# Altium PCB PCB_Hammond_1591GSGY.PcbDoc
Units mil, origin at the board's own origin, x right, y up, seen from the top; angles counter-clockwise.
Board outline 4566.93 x 3503.94 mil, 2 copper layers (Top Layer, Bottom Layer); 47 components, 80 nets, 349 pads, 78 vias.
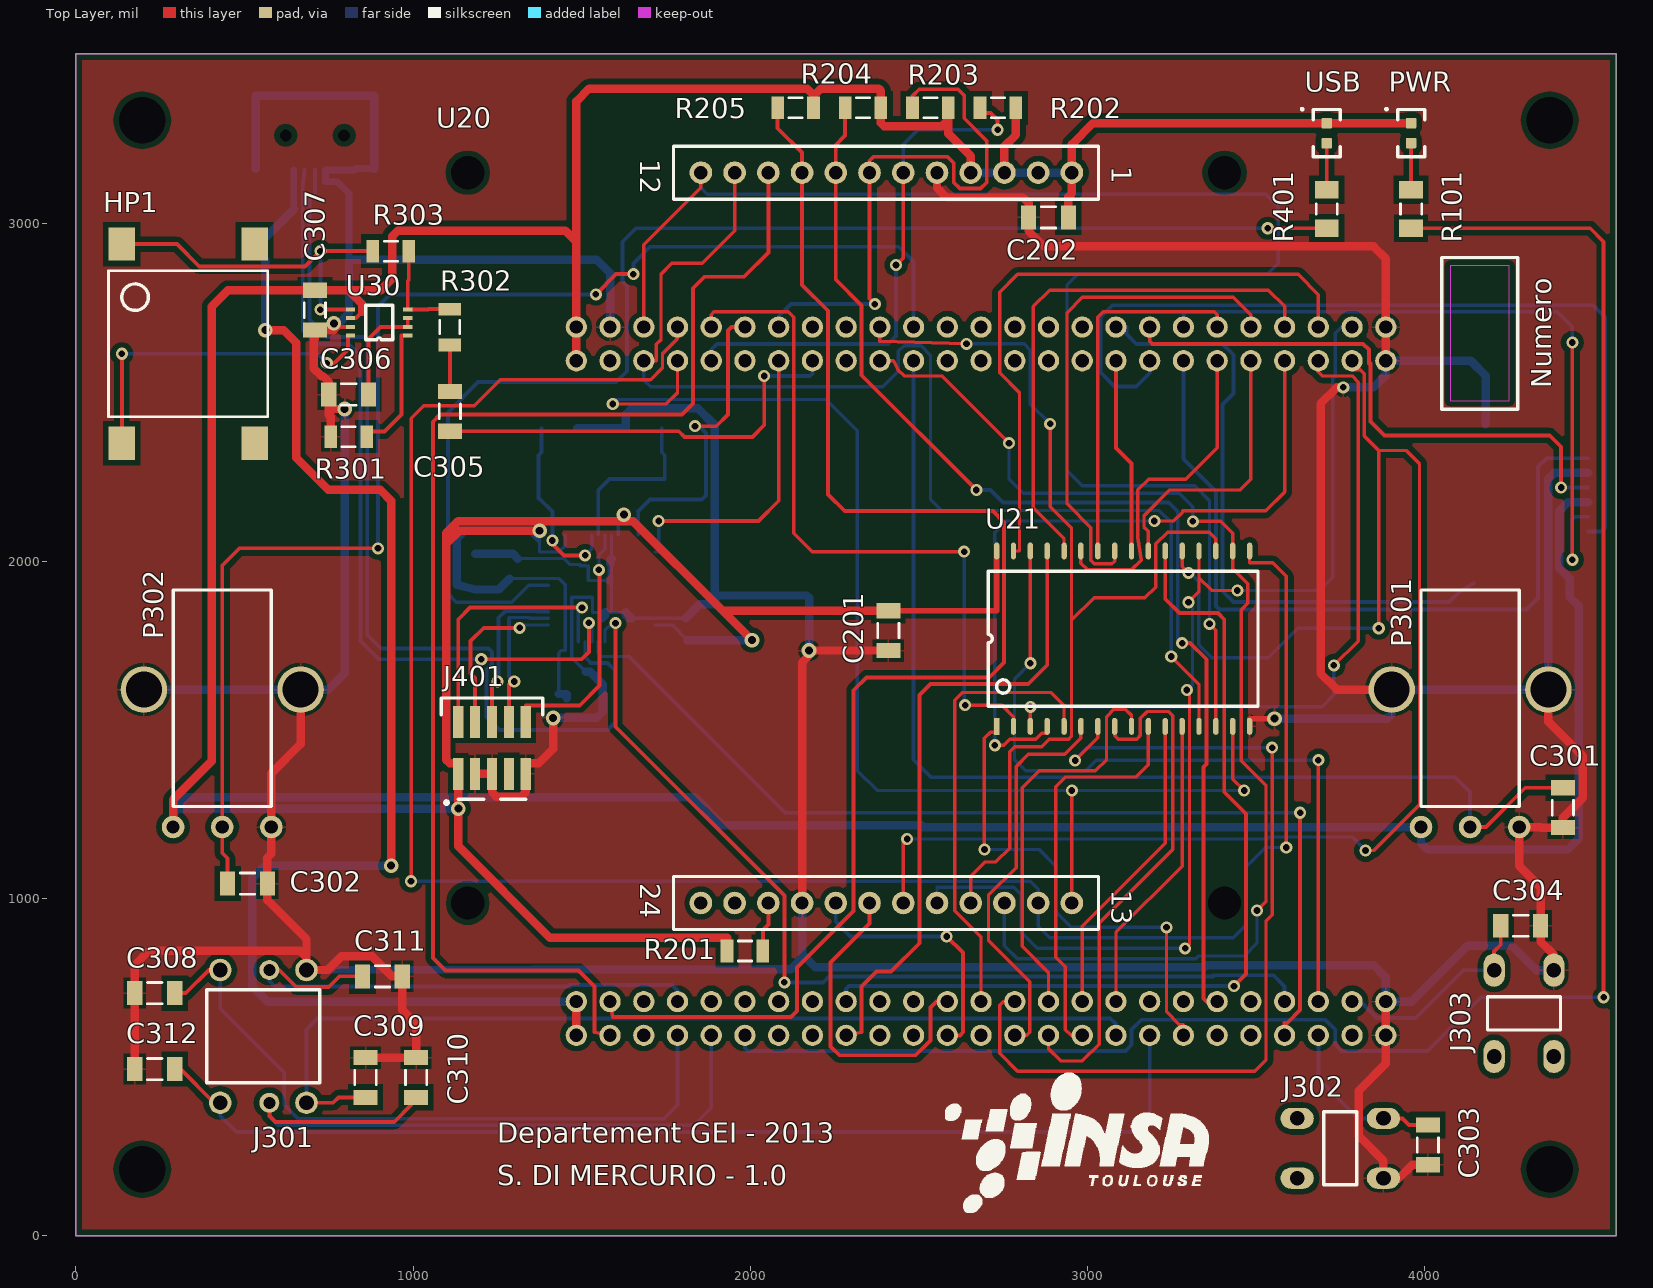
[diagram p0: Top Layer view]
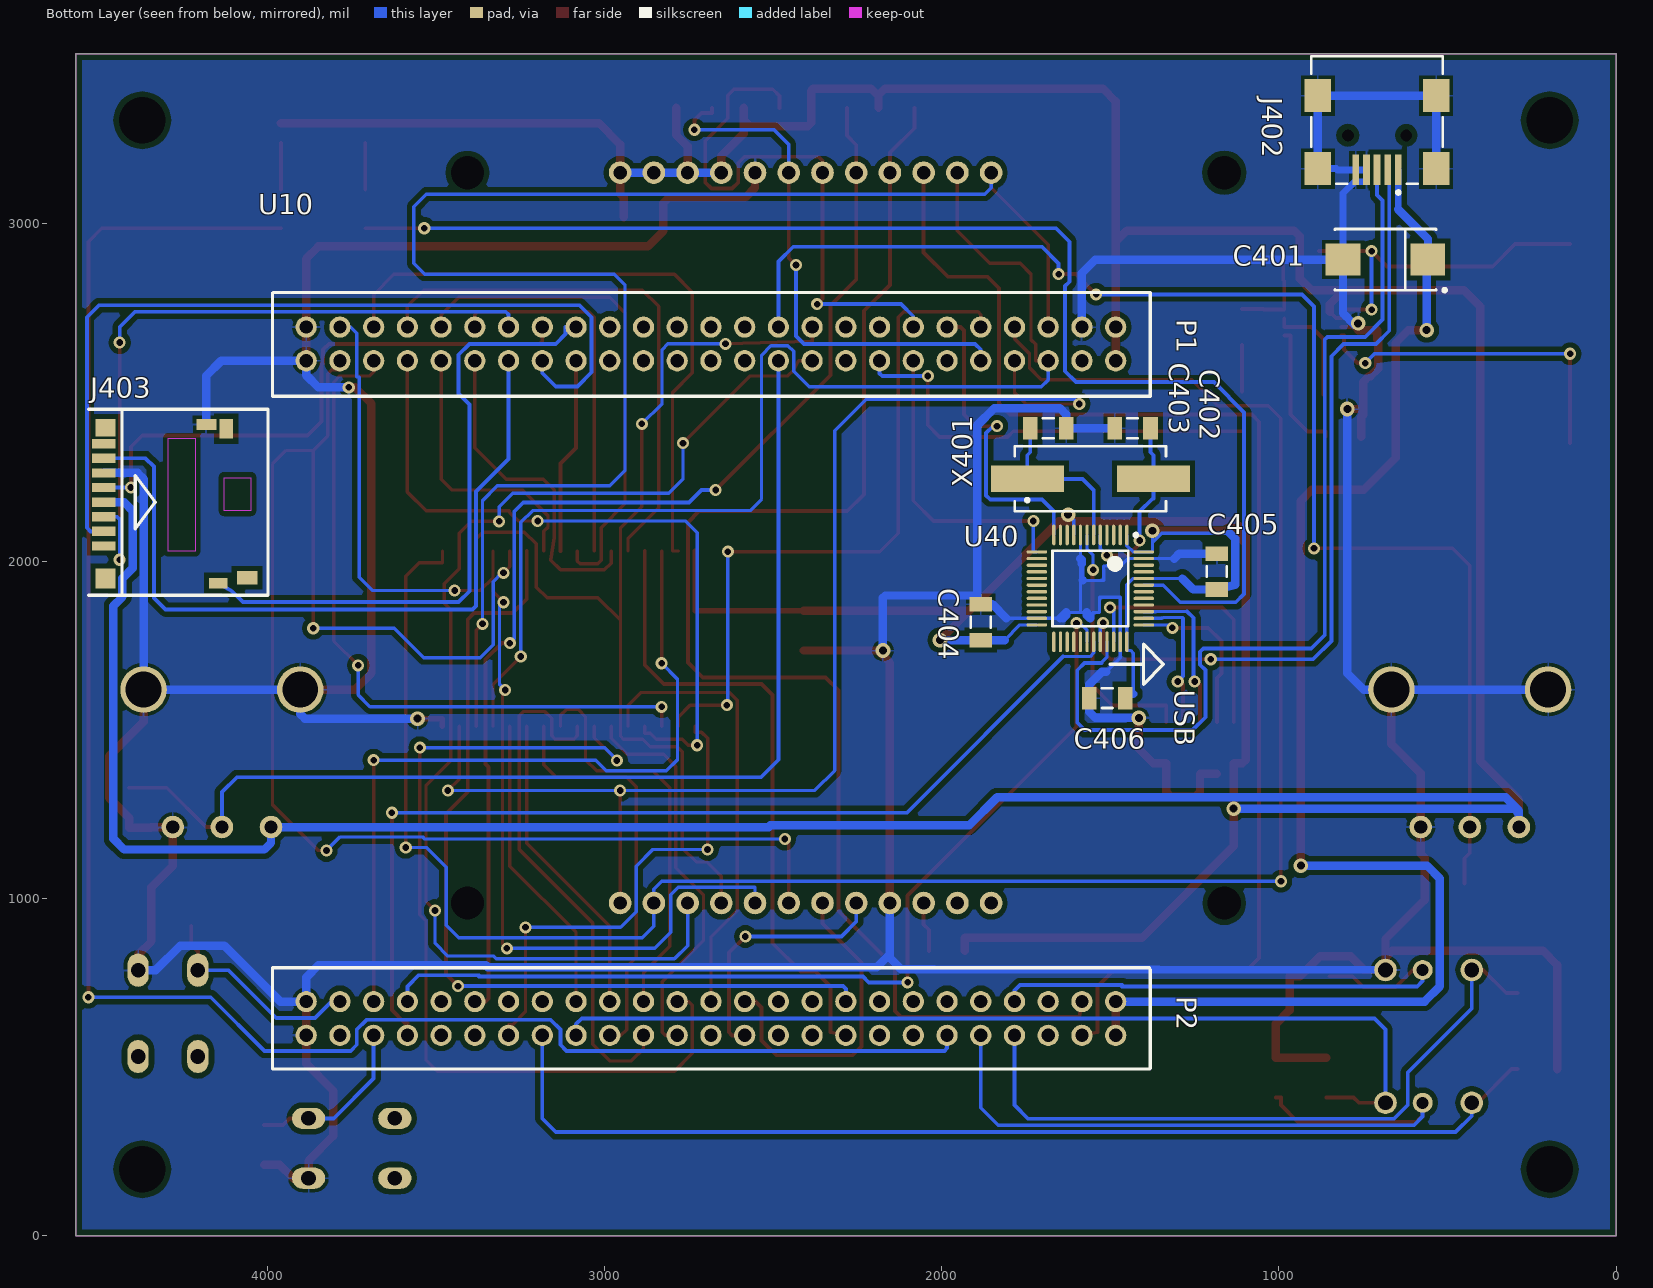
[diagram p1: Bottom Layer view, seen from below]

## Layer stack, top to bottom
Top Layer: signal copper 1.4
Dielectric: dielectric 12.6, FR-4, Dk 4.8
Bottom Layer: signal copper 1.4

## Board outline
0,0 4566.93,0 4566.93,3503.94 0,3503.94

## Design rules (kind name [scope] priority, off if disabled: settings)
Clearance "Polygon Clearance" [InPolygon] p1: gap=16
Clearance [All] p2: gap=8
ComponentClearance [All] p1 off: gap=10 collisioncheckmode=3 verticalgap=10 showdistances=FALSE
DiffPairsRouting [All] p1: maxlimit=393.7 minlimit=4.92 mostfreqgap=5.91 maxuncoupledlength=500
FabricationTestPointUsage FabricationTestPointUsage_1 [All] p1: valid=0 allowmultiple=FALSE
FabricationTestpoint FabricationTestpoint_1 [All] p1: side=3 testpointundercomponent=TRUE minsize=40 maxsize=100 preferedsize=60 minholesize=0 maxholesize=40 preferedholesize=32 testpointgrid=1 allowsidetop=TRUE allowsidebottom=TRUE usegrid=TRUE gridtolerance=0.01
HoleSize [All] p1: absolutevalues=TRUE maxlimit=236.22 minlimit=11.81 maxpercent=80.000 minpercent=20.000
HoleSize FabricationTestpoint [All] p2 off: absolutevalues=TRUE maxlimit=100 minlimit=1 maxpercent=80.000 minpercent=20.000
HoleSize FabricationTestPointUsage [All] p3 off: absolutevalues=TRUE maxlimit=100 minlimit=1 maxpercent=80.000 minpercent=20.000
MinimumSolderMaskSliver [All] p1: minsoldermaskwidth=1.93
PlaneClearance [All] p1: clearance=19.68
PlaneConnect PlaneConnect_Power [InNetClass('Power')] p1: planeconnectstyle=Relief reliefexpansion=20 reliefentries=4 reliefconductorwidth=16 reliefairgap=16
PlaneConnect [All] p2: planeconnectstyle=Relief reliefexpansion=15.75 reliefentries=4 reliefconductorwidth=8 reliefairgap=10
PolygonConnect [All] p1: connectstyle=Relief reliefconductorwidth=5.91 reliefentries=4 polygonreliefangle="90 Angle" airgapwidth=10
RoutingCorners [All] p1: cornerstyle=45-Degree minsetback=16 maxsetback=16
RoutingVias RoutingVias_Power [InNetClass('Power')] p1: holewidth=23.62 width=43.31 viastyle="Through Hole" minholewidth=23.62 minwidth=43.31 maxholewidth=23.62 maxwidth=43.31
RoutingVias [All] p2: holewidth=19.68 width=35.83 viastyle="Through Hole" minholewidth=19.68 minwidth=35.83 maxholewidth=19.68 maxwidth=35.83
SMDNeckDown SMDNeckDown_others [InNetClass('Others')] p1: percent=100.000
SMDNeckDown SMDNeckDown_Power [InNetClass('Power')] p2: percent=100.000
SilkscreenOverComponentPads [All] p1: minsilkscreentomaskgap=10
SolderMaskExpansion [All] p1: expansion=2.95
Width "Add bus" [InNetClass('A[0..18]')] p1: maxlimit=10 minlimit=8 preferedwidth=10
Width "Data Bus" [InNetClass('D[0..7]')] p2: maxlimit=10 minlimit=8 preferedwidth=10
Width "Power Bus" [InNetClass('Power')] p3: maxlimit=25 minlimit=9.8 preferedwidth=25
Width Default [All] p4: maxlimit=16 minlimit=8 preferedwidth=11.5
18 further rules are at their usual default settings.

## Classes and differential pairs
net class Others: JTCK JTDI JTDO JTMS KEY_CENTER KEY_DOWN KEY_LEFT KEY_RIGHT KEY_UP LCD_CS LCD_RD LCD_RS LCD_WR LED_PWR NetC301_2 NetC302_2 NetC303_2 NetC304_2 NetC305_1 NetC305_2 NetC306_1 NetC402_1 NetC403_1 NetHP1_2 NetHP1_3 NetJ402_2 NetJ402_3 NetJ403_2 NetJ403_3 NetJ403_5 NetJ403_7 NetJ403_A NetPWR_A NetR201_2 NetR301_2 NetR302_2 NetR401_1 NetR401_2 NetU10_11 NetU10_14 NetU10_34 NetU10_54 NetU10_67 NetU10_68 NetU10_73 NetU10_74 NetU10_85 NetU10_93 NetU10_94 NRST
net class Power: 5V GND VCC
net class D[0..7]: D0 D1 D2 D3 D4 D5 D6 D7
net class A[0..18]: A0 A1 A2 A3 A4 A5 A6 A7 A8 A9 A10 A11 A12 A13 A14 A15 A16 A17 A18
component class Power_Debug: C401 C402 C403 C404 C405 C406 J401 J402 J403 R401 U40 USB X401
component class MCU: PWR R101 U10
component class LCD_SRAM: C201 C202 R201 R202 R203 R204 R205 U20 U21
component class Audio_Keys: C301 C302 C303 C304 C305 C306 C307 C308 C309 C310 C311 C312 HP1 J301 J302 J303 P301 P302 R301 R302 R303 U30

## Components (designator, comment, footprint, x,y, rotation, side; value= is the part's Value field where it differs from the comment)
C201 "CAP 100nF 16V 1206(3216)" CAPC1206(3216)100_N 2408.91,1793.91 r270 top
C202 "CAP 100nF 16V 1206(3216)" CAPC1206(3216)100_N 2883.91,3018.91 r180 top
C301 "CAP 100nF 16V 1206(3216)" CAPC1206(3216)100_N 4408.91,1268.91 r90 top
C302 "CAP 100nF 16V 1206(3216)" CAPC1206(3216)100_N 508.91,1043.91 r180 top
C303 "CAP 100nF 16V 1206(3216)" CAPC1206(3216)100_N 4008.91,268.91 r90 top
C304 "CAP 100nF 16V 1206(3216)" CAPC1206(3216)100_N 4283.91,918.91 r180 top
C305 "CAP 100nF 16V 1206(3216)" CAPC1206(3216)100_N 1108.91,2443.91 r270 top
C306 "CAP 100nF 16V 1206(3216)" CAPC1206(3216)100_N 808.91,2493.91 r180 top
C307 "CAP 100nF 16V 1206(3216)" CAPC1206(3216)100_N 708.91,2743.91 r270 top
C308 "CAP 100nF 16V 1206(3216)" CAPC1206(3216)100_N 233.91,718.91 r180 top
C309 "CAP 100nF 16V 1206(3216)" CAPC1206(3216)100_N 858.91,468.91 r90 top
C310 "CAP 100nF 16V 1206(3216)" CAPC1206(3216)100_N 1008.91,468.91 r90 top
C311 "CAP 100nF 16V 1206(3216)" CAPC1206(3216)100_N 908.91,768.91 r0 top
C312 "CAP 100nF 16V 1206(3216)" CAPC1206(3216)100_N 233.91,493.91 r180 top
C401 "Cap Pol3" "EIA 7343-31 D" 683.91,2893.91 r0 bottom
C402 "Cap Semi" CAPC3216L 1433.91,2393.91 r0 bottom
C403 "Cap Semi" CAPC3216L 1683.91,2393.91 r180 bottom
C404 "Cap Semi" CAPC3216L 1883.91,1818.91 r270 bottom
C405 "Cap Semi" CAPC3216L 1183.91,1968.91 r270 bottom
C406 "Cap Semi" CAPC3216L 1508.91,1593.91 r180 bottom
HP1 "NDT-03C" NDT-03C 530,2940 r270 top locked
J301 "SKQUCAA010" SKQUCAA010 683.91,393.91 r90 top locked
J302 "SPST MicroSwitch" SPST_MicroSwitch 3758.91,268.91 r180 top locked
J303 "SPST MicroSwitch" SPST_MicroSwitch 4283.91,668.91 r270 top locked
J401 "JTAG-10" 2199SB-10G-301523 1333.91,1368.91 r90 top
J402 "440247-1" 440247 708.91,3468.91 r90 bottom locked
J403 "DM3D-SF" DM3D-SF 4508.91,1918.91 r270 bottom locked
P301 "POT Type 51" "POT Type 51" 4133.91,1618.91 r0 top locked
P302 "POT Type 51" "POT Type 51" 433.91,1618.91 r0 top locked
PWR "Led" "OSRAM LO Q971" 3958.91,3268.91 r90 top
R101 "Res_EU" RESC3216N 3958.91,3043.91 r90 top
R201 "10K" RESC1206(3216)_L 1983.91,843.91 r0 top
R202 "10K" RESC1206(3216)_L 2733.91,3343.91 r180 top
R203 "10K" RESC1206(3216)_L 2533.91,3343.91 r180 top
R204 "10K" RESC1206(3216)_L 2333.91,3343.91 r180 top
R205 "10K" RESC1206(3216)_L 2133.91,3343.91 r180 top
R301 "10K" RESC1206(3216)_L 808.91,2368.91 r0 top
R302 "10K" RESC1206(3216)_L 1108.91,2693.91 r90 top
R303 "10K" RESC1206(3216)_L 933.91,2918.91 r180 top
R401 "Res_EU" RESC3216N 3708.91,3043.91 r90 top
U10 "STM32F3-DISCOVERY" STM32F3-DISCOVERY 2483.91,1693.91 r270 bottom locked
U20 "INT024BTFT" INT024BTFT 2283.91,2068.91 r270 top locked
U21 "AS64C4008" SOP32 2730,1510 r90 top
U30 "TS4990" MiniSOP-8 983.91,2668.91 r180 top
U40 "STM32F103C4T6A" LQFP48_L 1558.91,1918.91 r270 bottom
USB "Led" "OSRAM LO Q971" 3708.91,3268.91 r90 top
X401 "HC49/4H_SMX" HC49/4H_SMX 1558.91,2243.91 r180 bottom

## Footprints (in the part's own frame and the unit in brackets; to place one, negate y for a bottom-side part, rotate by r counter-clockwise, add the part's x,y. Pads: shape width x height; smd on the part's side, far side on the other; paste and mask are expansions set on the pad)
2199SB-10G-301523 [mm] "Embase male 2x5 contacts, 1.27 mm"
  rect 2.4x0.76 smd: 1(0,5.08) 2(3.9,5.08) 3(0,3.81) 4(3.9,3.81) 5(0,2.54) 6(3.9,2.54) 7(0,1.27) 8(3.9,1.27) 9(0,0) 10(3.9,0)
  silkscreen extent -2.29,-1.27 5.71,6.35, body extent -1.3,-0.48 5.2,5.56, height 4.55
440247 [mm] "Connector; USB2.0, Type B, SM; 5 Position; Right Angle"
  rect 2.3x0.5 smd: 1(-7.85,-1.6) 2(-7.85,-0.8) 3(-7.85,0) 4(-7.85,0.8) 5(-7.85,1.6)
  rect 2.5x2 smd: 6(-7.75,4.45) 7(-2.25,4.45) 8(-7.75,-4.45) 9(-2.25,-4.45)
  round 0.6 hole 0.9 unplated: MH1(-5.25,2.2) MH2(-5.25,-2.2)
  silkscreen extent -9.67,-4.95 0.7,4.95
CAPC1206(3216)100_N [mm] "Chip Capacitor, Body 3.2x1.6mm, Height 1mm, IPC Medium Density"
  rect 1.15x1.8 smd: 1(-1.5,0) 2(1.5,0)
  silkscreen extent -0.55,-0.8 0.55,0.8, body extent -1.7,-0.9 1.7,0.9, height 1
CAPC3216L [mm] "Chip Capacitor, Body 3.2x1.6mm, IPC High Density"
  rect 1.1x1.7 smd: 1(-1.35,0) 2(1.35,0)
  silkscreen extent -0.4,-0.75 0.4,0.75, body extent -1.7,-0.9 1.7,0.9, height 1.3
DM3D-SF [mm] "MicroSD card connector"
  rect 0.7x1.75 smd: 1(-3.2,0.625) 2(-4.3,0.625) 3(-5.4,0.625) 4(-6.5,0.625) 5(-7.6,0.625) 6(-8.7,0.625) 7(-9.8,0.625) 8(-10.9,0.625)
  rect 0.8x1.4 smd: A(-0.4,9.25)
  rect 0.8x1.5 smd: B(-12.35,8.35)
  rect 1.5x1.5 smd: G0(-0.75,0.75)
  rect 1.3x1.5 smd: G1(-12.1,0.75)
  rect 1x1.55 smd: G2(-0.8,11.425)
  rect 1.45x1 smd: G3(-12.025,9.85)
  Top Layer keep-out region: -8.35,11.7 -5.85,11.7 -5.85,9.7 -8.35,9.7
  Top Layer keep-out region: -11.3,7.5 -2.8,7.5 -2.8,5.5 -11.3,5.5
  silkscreen extent -13.5,-0.5 0.5,13
"EIA 7343-31 D" [mm] "Capacitor, SM Tantalum; Body 7.3 x 4.3 mm (LxW typ)"
  rect 2.6x2.4 smd: 1(-3.2,0) 2(3.2,0)
  silkscreen extent -4.57,-2.3 3.8,2.42
HC49/4H_SMX [mm] "Surface Mount Quartz Crystal; Body 13.4 (inc. leads) x 4.9 mm (LxW max)"
  rect 5.5x2 smd: 1(-4.75,0) 2(4.75,0)
  silkscreen extent -5.7,-2.45 5.7,2.45
INT024BTFT [mm]
  round 1.7 hole 1: 1(-27.5,17) 2(-27.5,14.46) 3(-27.5,11.92) 4(-27.5,9.38) 5(-27.5,6.84) 6(-27.5,4.3) 7(-27.5,1.76) 8(-27.5,-0.78) 9(-27.5,-3.32) 10(-27.5,-5.86) 11(-27.5,-8.4) 12(-27.5,-10.94) 13(27.5,17) 14(27.5,14.46) 15(27.5,11.92) 16(27.5,9.38) 17(27.5,6.84) 18(27.5,4.3) 19(27.5,1.76) 20(27.5,-0.78) 21(27.5,-3.32) 22(27.5,-5.86) 23(27.5,-8.4) 24(27.5,-10.94)
  round 1.524 hole 2.5 unplated: D1(-27.5,28.5) D2(27.5,28.5) D3(27.5,-28.5) D4(-27.5,-28.5)
  silkscreen extent -29.5,-13 29.5,19
LQFP48_L [mm] "Thin QFP, 48-Leads, Body 7x7mm, Pitch 0.5mm, IPC High Density"
  oval 1.55x0.25 smd: 1(-4.025,2.75) 2(-4.025,2.25) 3(-4.025,1.75) 4(-4.025,1.25) 5(-4.025,0.75) 6(-4.025,0.25) 7(-4.025,-0.25) 8(-4.025,-0.75) 9(-4.025,-1.25) 10(-4.025,-1.75) 11(-4.025,-2.25) 12(-4.025,-2.75) 25(4.025,-2.75) 26(4.025,-2.25) 27(4.025,-1.75) 28(4.025,-1.25) 29(4.025,-0.75) 30(4.025,-0.25) 31(4.025,0.25) 32(4.025,0.75) 33(4.025,1.25) 34(4.025,1.75) 35(4.025,2.25) 36(4.025,2.75)
  oval 0.25x1.55 smd: 13(-2.75,-4.025) 14(-2.25,-4.025) 15(-1.75,-4.025) 16(-1.25,-4.025) 17(-0.75,-4.025) 18(-0.25,-4.025) 19(0.25,-4.025) 20(0.75,-4.025) 21(1.25,-4.025) 22(1.75,-4.025) 23(2.25,-4.025) 24(2.75,-4.025) 37(2.75,4.025) 38(2.25,4.025) 39(1.75,4.025) 40(1.25,4.025) 41(0.75,4.025) 42(0.25,4.025) 43(-0.25,4.025) 44(-0.75,4.025) 45(-1.25,4.025) 46(-1.75,4.025) 47(-2.25,4.025) 48(-2.75,4.025)
  silkscreen extent -4.15,-2.85 2.85,3.55, body extent -3.5,-3.5 3.5,3.5, height 1.6
MiniSOP-8 [mm]
  rect 0.7x0.3 smd: 1(0,0) 2(0,-0.65) 3(0,-1.3) 4(0,-1.95) 5(4.3,-1.95) 6(4.3,-1.3) 7(4.3,-0.65) 8(4.3,0)
  silkscreen extent 1.13,-2.28 3.16,0.33
NDT-03C [mm]
  rect 2.5x2 smd: 1(0,0) 2(0,-10) 3(15,-10) 4(15,0)
  silkscreen extent 2,-11 13,1
"OSRAM LO Q971" [mm] "Chip Led"
  rrect25% 0.8x0.8 smd: A(-0.75,0) K(0.75,0)
  silkscreen extent -1.78,-1.02 1.85,1.9
"POT Type 51" [mm]
  round 1.7 hole 1: 1(-3.7,-10.35) 2(0,-10.35) 3(3.7,-10.35)
  round 3.5 hole 2.7: 4(-5.9,0) 5(5.9,0)
  silkscreen extent -3.7,-8.8 3.7,7.5
RESC1206(3216)_L [mm] "Chip Resistor, Body 3.2x1.6mm, IPC High Density"
  rect 0.95x1.7 smd: 1(-1.35,0) 2(1.35,0)
  silkscreen extent -0.5,-0.75 0.5,0.75, body extent -1.67,-0.87 1.67,0.87, height 0.75
RESC3216N [mm] "Chip Resistor, Body 3.2x1.6mm, IPC Medium Density"
  rect 1.3x1.8 smd: 1(-1.45,0) 2(1.45,0)
  silkscreen extent -0.4,-0.8 0.4,0.8, body extent -1.68,-0.87 1.68,0.87, height 0.71
SKQUCAA010 [mm] "4 ways + Center switch"
  round 1.7 hole 1.1: 1(0,6.5) 3(0,0) 4(10,0) 6(10,6.5)
  round 1.5 hole 0.9: 2(0,2.8) 5(10,2.8)
  silkscreen extent 1.5,-1 8.5,7.5
SOP32 [mil]
  rect 50x16 smd: 1(0,0)
  oval 50x16 smd: 2(0,-50) 3(0,-100) 4(0,-150) 5(0,-200) 6(0,-250) 7(0,-300) 8(0,-350) 9(0,-400) 10(0,-450) 11(0,-500) 12(0,-550) 13(0,-600) 14(0,-650) 15(0,-700) 16(0,-750) 17(520,-750) 18(520,-700) 19(520,-650) 20(520,-600) 21(520,-550) 22(520,-500) 23(520,-450) 24(520,-400) 25(520,-350) 26(520,-300) 27(520,-250) 28(520,-200) 29(520,-150) 30(520,-100) 31(520,-50) 32(520,0)
  silkscreen extent 60,-775 460,25
SPST_MicroSwitch [mm]
  oval 2.5x1.6 hole 1.1: 1(-3,2.5) 2(3.5,2.5) 3(-3,-2) 4(3.5,-2)
  silkscreen extent -1,-2.5 1.5,3
STM32F3-DISCOVERY [mm]
  round 1.6 hole 1: 1(-25.4,25.4) 2(-22.86,25.4) 3(-25.4,22.86) 4(-22.86,22.86) 5(-25.4,20.32) 6(-22.86,20.32) 7(-25.4,17.78) 8(-22.86,17.78) 9(-25.4,15.24) 10(-22.86,15.24) 11(-25.4,12.7) 12(-22.86,12.7) 13(-25.4,10.16) 14(-22.86,10.16) 15(-25.4,7.62) 16(-22.86,7.62) 17(-25.4,5.08) 18(-22.86,5.08) 19(-25.4,2.54) 20(-22.86,2.54) 21(-25.4,0) 22(-22.86,0) 23(-25.4,-2.54) 24(-22.86,-2.54) 25(-25.4,-5.08) 26(-22.86,-5.08) 27(-25.4,-7.62) 28(-22.86,-7.62) 29(-25.4,-10.16) 30(-22.86,-10.16) 31(-25.4,-12.7) 32(-22.86,-12.7) 33(-25.4,-15.24) 34(-22.86,-15.24) 35(-25.4,-17.78) 36(-22.86,-17.78) 37(-25.4,-20.32) 38(-22.86,-20.32) 39(-25.4,-22.86) 40(-22.86,-22.86) 41(-25.4,-25.4) 42(-22.86,-25.4) 43(-25.4,-27.94) 44(-22.86,-27.94) 45(-25.4,-30.48) 46(-22.86,-30.48) 47(-25.4,-33.02) 48(-22.86,-33.02) 49(-25.4,-35.56) 50(-22.86,-35.56) 51(25.4,25.4) 52(27.94,25.4) 53(25.4,22.86) 54(27.94,22.86) 55(25.4,20.32) 56(27.94,20.32) 57(25.4,17.78) 58(27.94,17.78) 59(25.4,15.24) 60(27.94,15.24) 61(25.4,12.7) 62(27.94,12.7) 63(25.4,10.16) 64(27.94,10.16) 65(25.4,7.62) 66(27.94,7.62) 67(25.4,5.08) 68(27.94,5.08) 69(25.4,2.54) 70(27.94,2.54) 71(25.4,0) 72(27.94,0) 73(25.4,-2.54) 74(27.94,-2.54) 75(25.4,-5.08) 76(27.94,-5.08) 77(25.4,-7.62) 78(27.94,-7.62) 79(25.4,-10.16) 80(27.94,-10.16) 81(25.4,-12.7) 82(27.94,-12.7) 83(25.4,-15.24) 84(27.94,-15.24) 85(25.4,-17.78) 86(27.94,-17.78) 87(25.4,-20.32) 88(27.94,-20.32) 89(25.4,-22.86) 90(27.94,-22.86) 91(25.4,-25.4) 92(27.94,-25.4) 93(25.4,-27.94) 94(27.94,-27.94) 95(25.4,-30.48) 96(27.94,-30.48) 97(25.4,-33.02) 98(27.94,-33.02) 99(25.4,-35.56) 100(27.94,-35.56)
  silkscreen extent -28,-38.1 30.48,29

## Part data
C201 C202 C301 C302 C303 C304 C305 C306 C307 C308 C309 C310 C311 C312: library part CMP-1037-04185-1, "CAP 100nF 16V -20% to +80% 1206 (3216 Metric) Thickness 1mm SMD"
C401: "Polarized Capacitor (Surface Mount)"
C402 C403 C404 C405 C406: "Capacitor (Semiconductor SIM Model)"
HP1: "Audio HP"
J301: "4 ways + center switch"
J302 J303: "SPST - MicroSwitch"
J402: "USB 2.0, Right Angle, SMT, B Type, Receptacle, 5 Position, Black"
P301 P302: "25mm Diameter potentiometer"
R101 R401: "Resistor"
R201 R202 R203 R204 R205 R301 R302 R303: library part CMP-1014-00623-1, "10K 0.25W 1% 1206 (3216 Metric)  SMD"
U10: "STM32F3-Discovery"
U20: library part "LCD INT024BTFT"
U21: "SRAM 4Mbits 512K*8Bits 55 ns"
U40: "STM32 ARM-based 32-bit MCU Performance Line with 16 kB Flash, 6 kB Internal RAM, Internal Code A, -40 to +85°C Temperature, 48-Pin LQFP, Tray"
X401: "Surface Mount Quartz Crystal"

## Free pads (board coordinates)
  round 129.92 hole 137.8: 1(196.85,196.85) 1(196.85,3307.09) 1(4370.08,196.85) 1(4370.08,3307.09)

## Via types
v1: diameter 35.83, hole 19.68, Top Layer to Bottom Layer, 67 vias
v2: diameter 43.31, hole 23.62, Top Layer to Bottom Layer, 11 vias

## Nets (pads, with @x,y where several pads share a name; then routed paths per layer and width w, separated by ;. In a path a pad name is that pad's centre, name@x,y a point inside that pad or via, vN(x,y) a via of type N, cw(c..) or ccw(c..) an arc to the next point about the centre after c; other vN are vias at no path point)
5V: C401.1 J402.1 U10.51 U10.52 | length 4207.1
  Top Layer w25: v2(561.91,2684.91) 615.91,2684.91 652.91,2647.91 652.91,2306.91 748.91,2210.91 902.91,2210.91 934.91,2178.91 v2(934.91,1096.91) ; U10.52 U10.51
  Bottom Layer w19.68: 645.92,3042.91 J402.1
  Bottom Layer w25: v2(561.91,2684.91) 561.91,2893.91 C401.1 557.93,2954.92 645.92,3042.91 ; v2(934.91,1096.91) 560.91,1096.91 522.91,1058.91 522.91,738.91 567.91,693.91 U10.51
A0: U10.83 U21.12 | length 897.3
  Top Layer w10: U10.83 3083.91,898.91 3280,1095 U21.12
A1: U10.81 U21.11 | length 918
  Top Layer w10: U10.81 2983.91,916.91 3230,1163 U21.11
A2: U10.82 U21.10 | length 1203.6
  Top Layer w10: U10.82 2950.91,593.91 2933.91,610.91 2933.91,796.91 2905.91,824.91 2905.91,1330.91 2935,1360 3143.91,1360 3180,1396.09 U21.10
A3: U10.79 U21.9 | length 1202.3
  Top Layer w10: U10.79 2883.91,780 2805.91,858 2805.91,1328 2855.91,1378 3023,1378 3055.91,1410.91 3055.91,1538.91 3077.91,1560.91 3111.91,1560.91 3130,1542.82 U21.9
A4: U10.80 U21.8 | length 1562.2
  Top Layer w10: U10.80 2883.91,553.91 2919.91,517.91 2983.91,517.91 3033.91,567.91 3033.91,926.91 3251.91,1144.91 3251.91,1541.91 3239.91,1553.91 3175.91,1553.91 3155.91,1533.91 3155.91,1482.91 3145,1472 3090.91,1472 3080,1482.91 U21.8
A5: U10.77 U21.7 | length 2680.3
  Top Layer w10: U10.77 2749.91,693.91 2738.91,682.91 2738.91,540.91 2791.91,487.91 3495.91,487.91 3528.91,520.91 3528.91,933.43 3546.82,951.35 v1(3546.82,1446.91) ; v1(2962.91,1408.91) 3030,1476 U21.7
  Bottom Layer w10: v1(2962.91,1408.91) 2962.91,1410.91 2998.91,1446.91 v1(3546.82,1446.91)
A6: U10.78 U21.6 | length 1183
  Top Layer w10: U10.78 2819.41,593.91 2828.41,602.91 2828.41,753.41 2705.91,875.91 2705.91,1008.91 2787.91,1090.91 2787.91,1391 2823.91,1427 2932.09,1427 2980,1474.91 U21.6
A7: U10.75 U21.5 | length 1336.4
  Top Layer w10: U10.75 2683.91,884.91 2605.91,962.91 2605.91,1586.91 2629.46,1610.46 2890.45,1610.46 2930,1570.91 U21.5
A8: U10.40 U21.27 | length 988.6
  Top Layer w10: U21.27 2980,1993.91 2999.91,1974 3130,1974 3158.91,2002.91 3149,2070 3149,2210.91 3181,2242.91 3290.91,2242.91 3383.91,2335.91 U10.40
A9: U10.39 U21.26 | length 1093.8
  Top Layer w10: U21.26 3030,2722.91 3046,2738.91 3375.91,2738.91 3383.91,2730.91 U10.39
A10: U10.42 U21.23 | length 822.4
  Top Layer w10: U21.23 3180,2088 3167,2101 3167,2134 3243.91,2210.91 3451.91,2210.91 3483.91,2242.91 U10.42
A11: U10.41 U21.25 | length 1493
  Top Layer w10: U21.25 3080,2000.09 3071.91,1992 3019.82,1992 3008.91,2002.91 3008.91,2099.31 2938.91,2169.31 2938.91,2736.91 2983.91,2781.91 3431.91,2781.91 3483.91,2729.91 U10.41
A12: U10.44 U21.4 | length 2120.9
  Top Layer w10: v1(2724.91,1454) 2751.1,1454 2769.1,1472 2845.91,1472 2863.91,1490 2880,1490 U21.4 ; v1(3197.91,2118.91) 3255.91,2118.91 3281,2144 3281,2148.82 3527.91,2148.82 3583.91,2204.82 U10.44
  Bottom Layer w10: v1(2724.91,1454) 2724.91,2083.91 2759.91,2118.91 v1(3197.91,2118.91)
A13: U10.43 U21.28 | length 1608.4
  Top Layer w10: U21.28 2930,2066.91 2838.91,2158 2838.91,2754.91 2886.91,2802.91 3535.91,2802.91 3583.91,2754.91 U10.43
A14: U10.46 U21.3 | length 2093.8
  Top Layer w10: U21.3 v1(2830,1567.95) ; U10.46 3683.91,2560.91 3695.91,2548.91 3784.03,2548.91 3802.03,2530.91 3802.03,1762.91 v1(3729.91,1690.79)
  Bottom Layer w10: v1(2830,1567.95) 3694.95,1567.95 3729.91,1602.91 v1(3729.91,1690.79)
A15: U10.45 U21.31 | length 1897.1
  Top Layer w10: U21.31 2797.91,2030 2797.91,2498.91 2738.91,2557.91 2738.91,2796.91 2791.91,2849.91 3623.91,2849.91 3683.91,2789.91 U10.45
A16: U10.9 U21.2 | length 2102
  Top Layer w10: U10.9 1883.91,2730.91 1891.91,2738.91 2112.91,2738.91 2128.91,2722.91 2128.91,2082.91 2183.91,2027.91 v1(2633.91,2027.91) ; v1(2636.91,1572.91) 2746,1572.91 2780,1538.91 U21.2
  Bottom Layer w10: v1(2633.91,2027.91) 2633.91,1575.91 v1(2636.91,1572.91)
A17: U10.95 U21.30 | length 2282.2
  Top Layer w10: v1(2830,1697) U21.30 ; U10.95 v1(3683.91,1409.92)
  Bottom Layer w10: v1(2830,1697) 2783.09,1650.09 2783.09,1410.91 2816,1378 2993.82,1378 3025.75,1409.92 v1(3683.91,1409.92)
A18: U10.88 U21.1 | length 1453.1
  Top Layer w10: v1(2693.91,1144.91) 2693.91,1474.91 2711.91,1492.91 2730,1492.91 U21.1 ; v1(3233.91,913.91) 3233.91,663.91 3271.91,625.91 3283.91,625.91 U10.88
  Bottom Layer w10: v1(2693.91,1144.91) 2855.91,1144.91 2905.91,1094.91 2905.91,959.91 2951.91,913.91 v1(3233.91,913.91)
D0: U10.6 U20.11 U21.13 | length 3564.6
  Top Layer w10: U10.6 1721.41,2593.91 1721.41,2642.91 1734.91,2656.41 1734.91,2850.91 1766.91,2882.91 1857.2,2882.91 1953.2,2978.91 U20.11 ; v1(3247.91,1717) 3330,1634.91 U21.13
  Bottom Layer w10: U10.6 1683.91,2536.91 1703.91,2516.91 2392.91,2516.91 2438.91,2562.91 2438.91,2621.91 2455.91,2638.91 2505.91,2638.91 2533.91,2610.91 2533.91,2183.91 2567.91,2149.91 3212.91,2149.91 3247.91,2114.91 v1(3247.91,1717)
D1: U10.5 U20.12 U21.14 | length 4814.7
  Top Layer w10: U10.5 1683.91,2937.62 1853.2,3106.91 U20.12 ; v1(3361.2,1813.71) 3380,1794.91 U21.14
  Bottom Layer w10: U20.12 1853.2,3106.91 1872.2,3087.91 3527.91,3087.91 3564.91,3050.91 3564.91,2882.91 3532.91,2850.91 2970.91,2850.91 2938.91,2818.91 2938.91,2267.91 2983.91,2222.91 3317.2,2222.91 3361.2,2178.91 v1(3361.2,1813.71)
D2: U10.8 U20.13 U21.15 | length 3786
  Top Layer w10: v1(1591.91,2465.91) 1750.91,2465.91 1783.91,2498.91 U10.8 ; U20.13 v1(2953.2,1319.91) ; U21.15 3430,1353.82 v1(3463.91,1319.91)
  Bottom Layer w10: v1(1591.91,2465.91) 1605.16,2479.16 2223.66,2479.16 2316.91,2385.91 2316.91,1378.91 2375.91,1319.91 v1(2953.2,1319.91) v1(3463.91,1319.91)
D3: U10.7 U20.14 U21.17 | length 6224.1
  Top Layer w10: v1(993.91,1050.7) 993.91,2422.91 1031.91,2460.91 1181.91,2460.91 1258.41,2537.41 1703.91,2537.41 1739.41,2572.92 1739.41,2615.41 1783.91,2659.91 U10.7 ; U21.17 3480,1994.91 3548.91,1994.91 3588.91,1954.91 v1(3588.91,1150.91)
  Bottom Layer w10: v1(993.91,1050.7) 2829.41,1050.7 2853.2,1026.91 U20.14 2853.2,917.62 2887.91,882.91 3431.91,882.91 3468.91,919.91 3468.91,1091.91 3527.91,1150.91 v1(3588.91,1150.91)
D4: U10.20 U20.15 U21.18 | length 3545.7
  Top Layer w10: U10.20 2423.91,2593.91 2438.91,2565.91 2455.91,2548.91 2567.91,2548.91 v1(2766.91,2349.91) ; v1(3311.91,2117.91) 3395,2117.91 3430,2082.91 U21.18 3430,1977.73 3474.82,1932.91 3474.82,1874.91 3454.91,1855 3454.91,1407.91 3528.82,1334 3528.82,990.82 v1(3501.91,963.91)
  Bottom Layer w10: U20.15 2753.2,859.7 2791.91,821 3319.96,821 3327.87,828.91 3463.91,828.91 3501.91,866.91 v1(3501.91,963.91) ; v1(2766.91,2349.91) 2766.91,2242.91 2808.91,2200.91 3271.91,2200.91 3311.91,2160.91 v1(3311.91,2117.91)
D5: U10.19 U20.16 U21.19 | length 3065.5
  Top Layer w10: U10.19 2383.91,2651.91 v1(2640.91,2643.91) ; U20.16 2653.2,1065.2 2695.91,1107.91 2727.91,1107.91 2768.91,1148.91 2768.91,1434.91 2783.91,1449.91 2863.91,1449.91 2886,1472 2943.91,1472 2951.91,1480 2951.91,1823.91 ; v1(2888.91,2406.91) 2888.91,2161.31 2951.91,2098.31 2951.91,1823.91 ; U21.19 3380,2066.91 3360.91,2086 3237,2086 3201.91,2050.91 3201.91,1922.91 3169.91,1890.91 3018.91,1890.91 2951.91,1823.91
  Bottom Layer w10: v1(2640.91,2643.91) 2811.91,2643.91 2828.91,2626.91 2828.91,2466.91 v1(2888.91,2406.91)
D6: U10.47 U20.17 U21.20 | length 3351.4
  Top Layer w10: v1(3288.91,851.91) 3301.91,864.91 3301.91,1609.91 v1(3293.91,1617.91) ; v1(3298.91,1877.91) 3330,1909 3330,1950.82 ; U21.20 3330,1950.82 ; v1(3443.91,1912.91) 3367.91,1912.91 3330,1950.82
  Bottom Layer w10: U20.17 2553.2,1032.7 2781.12,1032.7 2802.91,1010.91 2802.91,898.91 2849.91,851.91 v1(3288.91,851.91) ; v1(3293.91,1617.91) 3310.82,1634.82 3310.82,1866 v1(3298.91,1877.91) ; v1(3443.91,1912.91) 3687.91,1912.91 3727,1952 3727,2545.82 3733.91,2545.82 3733.91,2675.91 3751.91,2693.91 U10.47
D7: U10.48 U20.18 U21.21 | length 4663.5
  Top Layer w10: U20.18 2453.2,1164.2 v1(2464.91,1175.91) ; U21.21 3280,1983.82 v1(3298.91,1964.91) ; U10.48 3783.91,2566.91 3808.03,2566.91 3820.03,2554.91 3820.03,2370.91 3863.03,2327.91 ; v1(3823.91,1141.91) 3847.91,1141.91 3983.91,1277.91 3983.91,2287.91 3943.91,2327.91 3863.03,2327.91 ; v1(3863.03,1800.91) 3863.03,2327.91
  Bottom Layer w10: v1(2464.91,1175.91) 3531.91,1175.91 3537.91,1181.91 3783.91,1181.91 v1(3823.91,1141.91) ; v1(3298.91,1964.91) 3303.91,1964.91 3329.82,1939 3329.82,1751.56 3367.91,1713.47 3535.47,1713.47 3622.91,1800.91 v1(3863.03,1800.91)
GND: C201.2 C202.2 C301.1 C302.1 C303.1 C304.1 C306.2 C307.2 C308.2 C309.2 C310.2 C311.2 C312.2 C401.2 C402.2 C403.2 C404.1 C405.1 C406.1 J301.4 J302.1 J303.1 J401.3 J401.5 J401.9 J402.4 J402.5 J402.6 J402.7 J402.8 J402.9 J403.6 J403.B P301.3 P301.4 P301.5 P302.3 P302.4 P302.5 R301.1 U10.3 U10.49 U10.50 U10.99 U10.100 U20.5 U20.21 U21.16 U30.7 U40.8 U40.23 U40.35 U40.47 | length 22834
  Top Layer w11.81: v2@765,2694.5 773.91,2694.5 U30.7
  Top Layer w16: U21.16 3480,1532.91 v2(3553.91,1532.91)
  Top Layer w25: C312.2 C308.2 174.85,802.91 216.85,844.91 663.91,844.91 683.91,824.91 ; P302.5 666.19,1457.52 579.58,1370.91 P302.3 579.58,1132.52 567.97,1120.91 C302.1 567.97,994.91 683.91,878.97 683.91,824.91 ; R301.1 755.76,2427.91 749.85,2433.82 749.85,2450.91 ; v2@765,2694.5 765,2684.85 C307.2 708.91,2657.32 705.5,2657.32 705.5,2570.91 727.91,2548.5 732.27,2548.5 749.85,2530.91 C306.2 749.85,2450.91 ; v2(765,2705) 773.91,2696.09 v2@773.91,2694.5 ; v2(796.91,2450.91) 749.85,2450.91 ; C309.2 C310.2 1008.91,627.91 967.97,668.85 C311.2 937.91,768.91 878.91,827.91 786.91,827.91 746.61,787.61 J301.4 683.91,824.91 ; J401.3 J401.5 1233.91,1314.91 1247.91,1300.91 1319.91,1300.91 1333.91,1314.91 J401.9 1333.91,1400.91 1372.91,1400.91 1414.91,1442.91 v2(1414.91,1534.91) ; U20.21 2153.2,1698.91 v2@2189.15,1734.85 ; v2(2173.91,1734.85) v2@2189.15,1734.85 ; C201.2 v2@2189.15,1734.85 ; U20.5 2553.2,3106.91 2581.99,3078.12 2807.91,3078.12 2824.85,3061.18 C202.2 2824.85,2978.91 2870.85,2932.91 3847.91,2932.91 3883.91,2896.91 U10.49 U10.50 ; v1(3757.91,2514.91) 3738.91,2514.91 3690.91,2466.91 3690.91,1666.91 3738.91,1618.91 P301.4 ; U10.99 U10.100 3883.91,509.91 3803.91,429.91 3803.91,295.02 3877.02,221.91 J302.1 3922.91,170.48 3962.28,209.85 C303.1 ; P301.5 4366.19,1523.63 4467.91,1421.91 4467.91,1297.91 4408.91,1238.91 C301.1 4344.49,1209.85 4342.91,1211.43 P301.3 4279.58,1096.3 4342.97,1032.91 C304.1 4342.97,872.28 4382.34,832.91 J303.1
  Bottom Layer w9.84: 1309.91,2007.49 U40.47 1447.65,2007.49 1465.3,1989.84 1495.07,1989.84 1495.07,1986.07 1511.28,1986.07 1511.28,1985.51 1519.62,1985.51 1519.62,1942.25 1581.29,1942.25 1581.29,1943.07 ; 1511.91,1671.99 1470.33,1713.57 U40.35 1470.33,1798.72 1470.07,1798.72 1470.07,1892.75 1531.75,1892.75 1531.75,1860.39 1532,1860.39 1532,1847.71 1551.68,1847.71 1551.68,1830.33 1559.91,1830.33 ; 1569.07,1847.71 1588.44,1847.71 ; 1581.75,1943.53 1581.75,1992.61 1584.76,1992.61 ; U40.8 1588.44,2007.49 1588.44,1847.71 ; 1630.75,1847.71 1588.44,1847.71 ; 1639.91,1830.33 1648.12,1830.33 U40.23 1807.91,1830.33
  Bottom Layer w19.68: J402.4 740.4,3124.42 775.91,3124.42 809.89,3090.44 C401.2
  Bottom Layer w20: J402.4 J402.5 825.91,3159.85 829.85,3163.79 J402.6
  Bottom Layer w25: P302.4 P302.5 748.91,1618.91 796.91,1666.91 v2(796.91,2450.91) ; J402.8 J402.9 J402.7 J402.6 ; J301.4 2022.5,789.73 2119.91,789.73 2153.2,823.03 2153.2,834.91 ; v2@773.91,2700.91 775.91,2700.91 784.41,2709.41 801.4,2726.4 809.89,2734.89 C401.2 1543.91,2893.91 1583.91,2853.91 U10.3 ; C405.1 1295.34,2022.06 1309.91,2007.49 ; v2(1414.91,1534.91) 1543.91,1534.91 1562.06,1553.06 C406.1 1562.06,1634.91 1524.98,1671.99 1511.91,1671.99 ; C402.2 C403.2 1630.76,2434.91 1649.51,2453.66 1843.44,2453.66 1894.19,2402.91 C404.1@1894.19,1872.06 ; 1559.91,1830.33 1569.07,1839.49 1569.07,1847.71 ; 1581.29,1943.07 1581.75,1943.53 ; 1584.76,1992.61 1584.76,2003.81 1588.44,2007.49 ; 1639.91,1830.33 1630.75,1839.49 1630.75,1847.71 1648.12,1830.33 ; 1807.91,1830.33 1849.64,1872.06 C404.1 C404.1@1894.19,1872.06 ; U20.21 2153.2,834.91 ; v2(2173.91,1734.85) 2173.91,1890.91 2166.91,1897.91 1895.91,1897.91 1895.91,1872.06 C404.1@1894.19,1872.06 ; v2(3553.91,1532.91) 3887.91,1532.91 3901.63,1546.63 P301.4 P301.5 4366.19,1936.5 4365.5,1936.5 4365.5,2242.91 4384.02,2261.43 J403.6 ; v1(3757.91,2514.91) 3847.91,2514.91 3883.91,2550.91 U10.50 4135.91,2593.91 4180.91,2548.91 4180.91,2405.13 J403.B ; J303.1 4329.91,787.02 4257.02,859.91 4126.91,859.91 3960.91,693.91 U10.99 3883.91,765.91 3847.91,801.91 3351.74,801.91 3345.32,795.5 2192.62,795.5 2153.2,834.91
JTCK: J401.4 U40.37 | length 496.1
  Top Layer w11.5: J401.4 1183.91,1652.95 1170.25,1666.62 1170.25,1762.91 1209.25,1801.91 v1(1315.91,1801.91)
  Bottom Layer w9.84: v1@1324.64,1810.64 U40.37
  Bottom Layer w11.5: v1(1315.91,1801.91) v1@1324.64,1810.64
JTDI: J401.8 U40.38 | length 446
  Top Layer w11.5: J401.8 1283.91,1634.91 1291.91,1642.91 v1(1299.91,1642.91)
  Bottom Layer w9.84: 1283.91,1830.33 1284.74,1830.33 1284.74,1832.91 1343.83,1832.91 1346.41,1830.33 U40.38
  Bottom Layer w11.5: 1283.91,1830.33 1283.91,1658.91 v1(1299.91,1642.91)
JTDO: J401.6 U40.39 | length 477.6
  Top Layer w11.5: J401.6 1233.91,1634.91 1241.91,1642.91 v1(1249.91,1642.91)
  Bottom Layer w9.84: 1271.91,1850.75 1363.51,1850.75 1364.25,1850.01 U40.39
  Bottom Layer w11.5: v1(1249.91,1642.91) 1253.07,1646.07 1253.07,1831.92 1271.91,1850.75
JTMS: J401.2 U40.34 | length 798.3
  Top Layer w11.5: J401.2 1133.91,1826.91 1168.91,1861.91 v1(1500.91,1861.91)
  Bottom Layer w9.84: U40.34 v1@1490.01,1861.91
  Bottom Layer w11.5: v1@1490.01,1861.91 v1(1500.91,1861.91)
KEY_CENTER: C308.1 J301.6 U10.58 | length 2049.2
  Top Layer w11.5: C308.1 325.91,718.91 394.61,787.61 J301.6
  Bottom Layer w11.5: J301.6 428,673.82 617.91,483.91 617.91,386.91 658.13,346.69 1743.69,346.69 1783.91,386.91 U10.58
KEY_DOWN: C309.1 J301.3 U10.84 | length 2852.3
  Top Layer w11.5: J301.3 762.91,393.91 778.85,409.85 C309.1
  Bottom Layer w11.5: J301.3 683.91,610.91 716.91,643.91 3066.91,643.91 3083.91,626.91 U10.84
KEY_LEFT: C310.1 J301.2 U10.60 | length 2123.2
  Top Layer w11.5: J301.2 573.67,354.91 591.67,336.91 943.91,336.91 993.91,386.91 993.91,409.85 C310.1
  Bottom Layer w11.5: J301.2 573.67,353.43 599.91,327.19 1831.91,327.19 1883.91,379.19 U10.60
KEY_RIGHT: C311.1 J301.5 U10.57 | length 1603.6
  Top Layer w11.5: J301.5 602.91,787.61 653.61,736.91 749.91,736.91 781.91,768.91 C311.1
  Bottom Layer w11.5: J301.5 573.67,754.91 589.67,738.91 1464.91,738.91 1464.91,742.91 1767.91,742.91 1783.91,726.91 U10.57
KEY_UP: C312.1 J301.1 U10.86 | length 3254.8
  Top Layer w11.5: C312.1 309.91,493.91 409.91,393.91 J301.1
  Bottom Layer w11.5: J301.1 428,354.91 476,306.91 3143.91,306.91 3183.91,346.91 U10.86
LCD_CS: R202.2 U10.10 U20.6 | length 1576.6
  Top Layer w11.5: v1(2431.91,2877.91) 2453.2,2899.2 U20.6 ; R202.2 2680.76,3328.91 2711.91,3328.91 2732.91,3307.91 v1(2732.91,3278.91)
  Bottom Layer w11.5: U10.10 1883.91,2626.91 1900.91,2643.91 2407.91,2643.91 2431.91,2667.91 v1(2431.91,2877.91) ; U20.6 2453.2,3234.91 2497.2,3278.91 v1(2732.91,3278.91)
LCD_RD: R204.2 U10.89 U20.8 | length 3482.5
  Top Layer w11.5: R204.2 2280.76,3261.47 2253.2,3233.91 U20.8 2253.2,2834.91 2329.91,2758.2 2329.91,2550.91 v1(2669.91,2210.91) ; v1(3279.91,1756.91) 3303.91,1756.91 3351.91,1708.91 3351.91,1397.91 3342.91,1388.91 3342.91,702.91 3351.91,693.91 U10.89
  Bottom Layer w11.5: v1(2669.91,2210.91) 2711.91,2210.91 2748.91,2173.91 3240.25,2173.91 3267.25,2146.91 3267.25,1769.57 v1(3279.91,1756.91)
LCD_RS: R203.2 U10.13 U20.7 | length 1686.2
  Top Layer w11.5: v1(2369.2,2761.91) 2353.2,2777.91 U20.7 2353.2,3186.91 2365.1,3198.8 2583.91,3198.8 2602.91,3179.8 2602.91,3122.91 2621.45,3104.37 2682.37,3104.37 2700.91,3122.91 2700.91,3245.91 2633.91,3312.91 2633.91,3380.91 2615.91,3398.91 2500.76,3398.91 2480.76,3378.91 R203.2
  Bottom Layer w11.5: U10.13 2083.91,2725.91 2119.91,2761.91 v1(2369.2,2761.91)
LCD_WR: R205.2 U10.53 U20.9 | length 4280.9
  Top Layer w11.5: U10.53 1591.91,647.91 2119.91,647.91 2137.91,665.91 2137.91,794.91 2305.91,962.91 2305.91,1617.11 2343.91,1655.11 2708.11,1655.11 2751.91,1698.91 2751.91,2114.91 2718.84,2147.98 2279.91,2147.98 2229.91,2197.98 2229.91,2742.2 2153.2,2818.91 U20.9 2153.2,3210.91 2080.76,3283.35 R205.2
LED_PWR: R101.1 U10.62 | length 5609.6
  Top Layer w11.5: R101.1 4490,2986.82 4529.91,2946.91 v1(4529.91,706.91)
  Bottom Layer w11.5: U10.62 1983.91,555.91 1991.91,547.91 3111.91,547.91 3129.91,565.91 3129.91,610.91 3158.91,639.91 3704.91,639.91 3733.91,610.91 3733.91,565.91 3751.91,547.91 4007.91,547.91 4166.91,706.91 v1(4529.91,706.91)
NetC301_2: C301.2 P301.2 U10.22 | length 3299.5
  Top Layer w11.5: P301.2 4180.91,1211.43 4297.45,1327.97 C301.2
  Bottom Layer w11.5: U10.22 2483.91,1410.91 2535.57,1359.25 4089.57,1359.25 4133.91,1314.91 P301.2
NetC302_2: C302.2 P302.2 U10.21 | length 4042
  Top Layer w11.5: C302.2 449.85,1118.91 433.91,1134.85 P302.2 433.91,1986.91 484.91,2037.91 v1(895.91,2037.91) ; v1(1541.91,2790.91) 1601.91,2850.91 v1(1652.91,2850.91)
  Bottom Layer w11.5: v1(895.91,2037.91) 895.91,2754.91 931.91,2790.91 v1(1541.91,2790.91) ; v1(1652.91,2850.91) 1652.91,2882.91 1701.91,2931.91 2439.91,2931.91 2483.91,2887.91 U10.21
NetC303_2: C303.2 J302.3 U10.96 | length 510.1
  Top Layer w11.5: J302.3 3932.91,347.65 3952.59,327.97 C303.2
  Bottom Layer w11.5: U10.96 3683.91,465.91 3802.17,347.65 J302.3
NetC304_2: C304.2 J303.3 U10.97 | length 640.5
  Top Layer w11.5: J303.3 4205.17,842.91 4224.85,862.59 C304.2
  Bottom Layer w11.5: U10.97 3808.91,693.91 3857.91,644.91 3972.8,644.91 4114.91,787.02 J303.3
NetC305_1: C305.1 R302.1 | length 137.8
  Top Layer w11.5: C305.1 R302.1
NetC305_2: C305.2 U10.16 | length 1282.6
  Top Layer w11.5: C305.2 1787.64,2384.85 1804.25,2368.25 2006.25,2368.25 2040.91,2402.91 v1(2040.91,2548.66)
  Bottom Layer w11.5: v1(2040.91,2548.66) 2175.91,2548.66 2183.91,2556.66 U10.16
NetC306_1: C306.1 U30.2 U30.3 | length 321.3
  Top Layer w11.5: C306.1 867.97,2658.91 903.56,2694.5 U30.2 U30.3
NetC402_1: C402.1 U40.5 X401.2 | length 544.4
  Top Layer w11.5: v1(1412.91,2060.91) 1412.91,2050.91 1446.91,2016.91 v1(1509.91,2016.91)
  Bottom Layer w9.84: v1(1509.91,2016.91) 1529.38,2036.38 U40.5
  Bottom Layer w11.5: C402.1 1380.76,2322.77 1371.9,2313.91 X401.2 1371.9,2185.91 1373.91,2185.91 1412.91,2146.91 v1(1412.91,2060.91)
NetC403_1: C403.1 U40.6 X401.1 | length 497.7
  Bottom Layer w9.84: U40.6 1549.07,2210.91
  Bottom Layer w11.5: 1549.07,2210.91 1582.07,2243.91 X401.1 1745.92,2313.91 1737.06,2322.77 C403.1
NetHP1_2: HP1.2 R303.2 U30.5 | length 1053.4
  Top Layer w11.5: HP1.2 299.82,2940 365.91,2873.91 679.91,2873.91 v1(724.91,2918.91) R303.2 ; v1(724.91,2745.68) U30.5
  Bottom Layer w11.5: v1(724.91,2745.68) v1(724.91,2918.91)
NetHP1_3: HP1.3 U30.8 | length 1013.6
  Top Layer w11.5: HP1.3 v1(136.3,2614.66) ; v1(743.91,2586.91) 766.91,2586.91 806.91,2626.91 806.91,2668.91 U30.8
  Bottom Layer w11.5: v1(136.3,2614.66) 716.16,2614.66 v1(743.91,2586.91)
NetJ402_2: J402.2 U40.32 | length 2378.4
  Top Layer w11.5: v1(1201.91,1708.91) 1498.91,1708.91 1520.91,1730.91 v1(1520.91,1816.91)
  Bottom Layer w9.84: v1(1520.91,1816.91) 1529.38,1808.44 U40.32
  Bottom Layer w11.5: J402.2 672.91,3112.91 672.91,2682.91 711.91,2643.91 807.91,2643.91 844.41,2607.41 844.41,1762.91 898.41,1708.91 v1(1201.91,1708.91)
NetJ402_3: J402.3 U40.33 | length 2823
  Bottom Layer w9.84: U40.33 1509.7,1714.91 1526.37,1698.24
  Bottom Layer w11.5: J402.3 708.91,3084.91 692.91,3068.91 692.91,2715.91 743.91,2664.91 855.91,2664.91 863.91,2656.91 863.91,1780.91 903.91,1740.91 1223.91,1740.91 1233.57,1731.25 1233.57,1692.57 1217.91,1676.91 1217.91,1536.91 1255.91,1498.91 1575.91,1498.91 1597.91,1520.91 1597.91,1676.24 1575.91,1698.24 1526.37,1698.24
NetJ403_2: J403.2 U10.36 | length 2582.6
  Bottom Layer w11.5: U10.36 3183.91,2557.91 3143.91,2517.91 3079.91,2517.91 3037.91,2559.91 3037.91,2722.91 3073.66,2758.66 4498.16,2758.66 4533.91,2722.91 4533.91,2098.91 4523.2,2088.2 J403.2
NetJ403_3: J403.3 U10.37 | length 2065.7
  Top Layer w11.5: v1@4436.91,2007.91 v1(4436.91,2647.91)
  Bottom Layer w11.5: U10.37 3283.91,2730.91 3292.16,2739.16 4391.91,2739.16 4436.91,2694.16 v1(4436.91,2647.91) ; v1@4436.91,2007.91 4435.91,2008.91 4435.91,2122.91 4444.51,2131.51 J403.3
  other v1: 4436.91,2003.91
NetJ403_5: J403.5 U10.35 | length 1717.5
  Top Layer w11.5: U10.35 3183.91,2651.91 3191.91,2643.91 3816.91,2643.91 3833.91,2626.91 3833.91,2585.66 3838.78,2585.66 3838.78,2414.04 3879.91,2372.91 4369.91,2372.91 4403.91,2338.91 v1(4403.91,2218.12)
  Bottom Layer w11.5: v1(4403.91,2218.12) J403.5
NetJ403_7: J403.7 U10.38 | length 2289.1
  Bottom Layer w11.5: U10.38 3283.91,2302.53 3380.25,2206.2 3380.25,1866.91 3390.79,1856.36 4300.82,1856.36 4335.37,1890.91 4335.37,2280.2 4359.91,2304.74 J403.7
NetJ403_A: J403.A U10.33 | length 1887.1
  Bottom Layer w11.5: U10.33 3114.91,2693.91 3114.91,2672.91 3143.91,2643.91 3399.91,2643.91 3431.91,2611.91 3431.91,2496.91 3399.75,2464.75 3399.75,1910.62 3431.91,1878.45 4071.91,1878.45 4103.91,1910.45 J403.A
NetPWR_A: PWR.A R101.2 | length 138.4
  Top Layer w11.5: R101.2 PWR.A
NetR201_2: R201.2 U20.22 | length 149
  Top Layer w11.5: R201.2 2037.06,906.91 2053.2,923.05 U20.22
NetR301_2: R301.2 U30.1 | length 392
  Top Layer w11.5: R301.2 862.06,2383.91 914.91,2383.91 965.91,2434.91 965.91,2668.91 U30.1
NetR302_2: R302.2 R303.1 U30.4 | length 300.1
  Top Layer w11.5: R303.1 987.06,2833.06 983.91,2829.91 U30.4 1044.91,2745.68 1046.29,2747.06 R302.2
NetR401_1: R401.1 U40.43 | length 3942
  Top Layer w11.5: v1(3533.91,2986.91) 3534,2986.82 R401.1
  Bottom Layer w9.84: 1291.91,1877.91 1342.75,1928.75 U40.43
  Bottom Layer w11.5: 1291.91,1877.91 1127.91,1877.91 1102.91,1902.91 1102.91,2440.91 1192.91,2530.91 1601.91,2530.91 1633.91,2562.91 1633.91,2815.49 1621.25,2828.15 1621.25,2946.91 1661.25,2986.91 v1(3533.91,2986.91)
NetR401_2: R401.2 USB.A | length 138.4
  Top Layer w11.5: R401.2 USB.A
NetU10_11: U10.11 U40.12 | length 931.3
  Top Layer w11.5: v1(1835.91,2399.91) 1898.91,2399.91 1933.91,2434.91 1933.91,2683.91 1943.91,2693.91 U10.11
  Bottom Layer w9.84: U40.12 1667.18,2146.91
  Bottom Layer w11.5: 1667.18,2146.91 1702.84,2182.57 1855.91,2182.57 1867.94,2194.6 1867.94,2379.88 1847.91,2399.91 v1(1835.91,2399.91)
NetU10_14: U10.14 U40.13 | length 898.1
  Top Layer w11.5: v1(1727.91,2118.91) 2023.91,2118.91 2083.91,2178.91 U10.14
  Bottom Layer w9.84: U40.13 1727.91,2027.18 v1(1727.91,2118.91)
NetU10_34: U10.34 U21.24 | length 583
  Top Layer w11.5: U10.34 3083.91,2335 3130,2288.91 U21.24
NetU10_54: U10.54 U20.10 | length 3926.1
  Top Layer w11.5: U10.54 1537.91,602.91 1537.91,738.91 1490.91,785.91 1095.91,785.91 1058.91,822.91 1058.91,2413.25 1079.91,2434.25 1797.25,2434.25 1829.91,2466.91 1829.91,2808.91 1863.91,2842.91 1981.2,2842.91 2053.2,2914.91 U20.10
NetU10_67: U10.67 U21.22 | length 2661.9
  Top Layer w11.5: U21.22 3230,1887.77 3271.91,1845.86 3385.96,1845.86 3404.91,1826.91 3404.91,1315.91 3469.91,1250.91 3469.91,775.91 v1(3433.91,739.91)
  Bottom Layer w11.5: U10.67 2283.91,730.91 2292.91,739.91 v1(3433.91,739.91)
NetU10_68: U10.68 U21.29 | length 1897.1
  Top Layer w11.5: U10.68 2329.91,602.91 2329.91,738.91 2373.91,782.91 2416.91,782.91 2500.91,866.91 2500.91,1602.91 2533.61,1635.61 2823.91,1635.61 2880,1691.7 U21.29
NetU10_73: U10.73 U20.19 | length 952.5
  Top Layer w11.5: U20.19 2353.2,925.2 2237.91,809.91 2237.91,560.91 2263.91,534.91 2489.91,534.91 2533.91,578.91 2533.91,675.91 2551.91,693.91 U10.73
NetU10_74: U10.74 U20.20 | length 755.9
  Top Layer w11.5: v1(2581.91,886.91) 2629.91,838.91 2629.91,602.91 2620.91,593.91 U10.74
  Bottom Layer w11.5: U20.20 2253.2,930.91 2297.2,886.91 v1(2581.91,886.91)
NetU10_85: U10.85
NetU10_93: U10.93 U40.30 | length 2899.6
  Top Layer w11.5: v1(1599.91,1815.91) 1599.91,1508.91 2100.91,1007.91 v1(2100.91,750.91)
  Bottom Layer w9.84: U40.30 1568.75,1794.91 1589.75,1815.91 v1(1599.91,1815.91)
  Bottom Layer w11.5: v1(2100.91,750.91) 2215.91,750.91 2232.91,767.91 3371.71,767.91 3371.71,771.91 3550.91,771.91 3583.91,738.91 U10.93
NetU10_94: U10.94 U40.31 | length 2993.5
  Top Layer w11.5: U10.94 3583.91,630.91 3591.91,630.91 3629.91,668.91 v1(3629.91,1253.91)
  Bottom Layer w9.84: U40.31 1549.07,1727.75 1559.91,1716.91 1639.91,1716.91
  Bottom Layer w11.5: 1639.91,1716.91 2102.91,1253.91 v1(3629.91,1253.91)
NRST: J401.10 U40.7 | length 747.3
  Top Layer w11.5: J401.10 1333.91,1571.93 1493.91,1571.93 1552.57,1630.59 1552.57,1972.25 v1(1550.91,1973.91)
  Bottom Layer w9.84: v1(1550.91,1973.91) 1550.91,2016.91 1568.75,2034.75 U40.7
VCC: C201.1 C202.1 C307.1 C404.2 C405.2 C406.2 J401.1 J403.4 P301.1 P302.1 PWR.K R201.1 R202.1 R203.1 R204.1 R205.1 U10.1 U10.2 U20.1 U20.2 U20.3 U20.4 U21.32 U30.6 U40.1 U40.9 U40.24 U40.36 U40.44 U40.48 USB.K | length 19236.5
  Top Layer w11.81: U30.6 830.09,2720.09 848.91,2738.91
  Top Layer w16: C201.1 2730,1852.97 U21.32
  Top Layer w25: P302.1 288.24,1292.24 402.91,1406.91 402.91,2754.91 450.97,2802.97 C307.1 807.91,2802.97 ; 848.91,2738.91 848.91,2761.97 807.91,2802.97 ; v2(1374.91,2089.91) 1136.91,2089.91 1097.91,2050.91 ; U10.2 U10.1 1483.91,2946.91 ; v2(1624.91,2137.91) v2@1624.91,2118.27 ; R201.1 1930.76,882.91 1405.91,882.91 1133.91,1154.91 v2(1133.91,1265.91) J401.1 1133.91,1400.91 1107.91,1400.91 1097.91,1410.91 1097.91,2050.91 ; v2(2004.91,1765.76) 1917.7,1852.97 ; R205.1 2187.06,3378.91 ; C201.1 1917.7,1852.97 ; R203.1 2587.06,3309.06 ; U20.4 2653.2,3200.77 2587.06,3266.91 2587.06,3309.06 ; U20.3 2753.2,3229.91 2787.06,3263.77 R202.1 ; C202.1 2942.97,3079.91 2953.2,3090.15 U20.1 2953.2,3235.73 3015.91,3298.44 USB.K PWR.K ; 807.91,2802.97 903.91,2802.97 937.91,2836.97 937.91,2962.91 954.91,2979.91 1450.91,2979.91 1483.91,2946.91 ; 1097.91,2050.91 1097.91,2082.91 1133.27,2118.27 v2@1624.91,2118.27 ; 1483.91,2946.91 1483.91,3362.91 1521.91,3400.91 2167.91,3400.91 2187.06,3381.76 2187.06,3378.91 ; v2@1624.91,2118.27 1652.4,2118.27 1917.7,1852.97 ; 2187.06,3378.91 2209.06,3400.91 2381.06,3400.91 2387.06,3394.91 R204.1 2387.06,3298.91 2396.06,3289.91 2567.91,3289.91 2587.06,3309.06
  Bottom Layer w9.84: 1145.91,2082.91 1346.91,2082.91 1374.91,2054.91 ; 1286.44,1948.44 U40.44 1431.91,1948.44 1450.64,1929.71 U40.36 1450.64,1734.91 1439.91,1734.91 1431.91,1726.91 1431.91,1605.91 ; v2(1374.91,2089.91) 1374.91,2054.91 ; U40.1 1450.64,2045.91 1431.91,2027.18 U40.48 1374.91,2027.18 1374.91,2054.91 ; U40.9 1608.12,2122.91 1623.12,2137.91 v2(1624.91,2137.91) ; U40.24 1767.91,1810.64 1812.79,1765.76
  Bottom Layer w25: P302.1 288.24,1250.91 ; v2(1133.91,1265.91) 303.24,1265.91 288.24,1250.91 ; 1145.91,2082.91 1129.91,2066.91 1129.91,1929.76 C405.2 1253.76,1915.76 1286.44,1948.44 ; 1431.91,1605.91 1455.76,1605.91 C406.2 ; 1812.79,1765.76 C404.2 v2(2004.91,1765.76) ; U20.4 U20.3 U20.2 U20.1 ; J403.4 4423.91,2174.82 4398.5,2149.4 4398.5,1978.91 4428.91,1948.5 4428.91,1893.91 4455.91,1866.91 4455.91,1176.91 4423.91,1144.91 4007.91,1144.91 3988.24,1164.58 P301.1 2512.65,1211.43 2507.66,1216.42 1918.4,1216.42 1834.91,1299.91 327.91,1299.91 288.24,1260.24 288.24,1250.91
pads on no net: HP1.1 HP1.4 J302.2 J302.4 J303.2 J303.4 J401.7 J402.MH1 J402.MH2 J403.1 J403.8 J403.G0 J403.G1 J403.G2 J403.G3 U10.4 U10.12 U10.15 U10.17 U10.18 U10.23 U10.24 U10.25 U10.26 U10.27 U10.28 U10.29 U10.30 U10.31 U10.32 U10.55 U10.56 U10.59 U10.61 U10.63 U10.64 U10.65 U10.66 U10.69 U10.70 U10.71 U10.72 U10.76 U10.87 U10.90 U10.91 U10.92 U10.98 U20.23 U20.24 U20.D1 U20.D2 U20.D3 U20.D4 U40.2 U40.3 U40.4 U40.10 U40.11 U40.14 U40.15 U40.16 U40.17 U40.18 U40.19 U40.20 U40.21 U40.22 U40.25 U40.26 U40.27 U40.28 U40.29 U40.40 U40.41 U40.42 U40.45 U40.46

## Polygon pours and split planes (outlines as drawn)
GND on Top Layer "Power Plan - TOP" (solid, remove dead copper, pour order 3): 0,3503.94 3.94,3500 4566.93,3500 4566.93,0 0,0 0,3503.94
GND on Bottom Layer "Power Plan - Bottom" (solid, remove dead copper, pour order 5): 0,3503.94 4566.93,3503.94 4566.93,0 0,0 0,3503.94

## Keep-outs
Top Layer:
  rectangle: 4075,2475 4250,2875
Keep-Out Layer:
  the board outline again, w3.94

## Silkscreen, mask and mechanical layers (free items; w line width, h text height)
Top Overlay:
  drawing of 26 lines, arcs and shapes, not listed
  text "Numero" at 4375,2512.5 h60 r90
  text "Departement GEI - 2013" at 1250,275 h60
  text "S. DI MERCURIO - 1.0" at 1250,150 h60
Top Solder:
  rectangle: 4062.5,2462.5 4262.5,2887.5
Mechanical 15:
  circle w10: c196.86,3307.1 r157.48
  circle w10: c4370.09,3307.1 r157.48
  circle w10: c4370.09,196.86 r157.48
  circle w10: c196.86,196.86 r157.48

## Text inside footprints (layer, text, board x,y; h text height)
J402: Mechanical 1 "PCB Edge" at 549.99,3485.93 h9.84 r180
U10: Bottom Overlay "USB" at 1308.91,1618.91 h60 r90; Bottom Overlay "P2" at 1302.81,709.66 h60 r90; Bottom Overlay "P1" at 1302.81,2717.53 h60 r90
U20: Top Overlay "24" at 1673.67,1045.29 h60 r270; Top Overlay "13" at 3071.31,1025.6 h60 r270; Top Overlay "12" at 1673.67,3190.96 h60 r270; Top Overlay "1" at 3071.31,3171.27 h60 r270